# Altium PCB PCB_Slave_Traffic_Light.PcbDoc
Units mil, origin at the board's own origin, x right, y up, seen from the top; angles counter-clockwise.
Board outline 4800 x 4500 mil, 2 copper layers (Top Layer, Bottom Layer); 17 components, 38 nets, 137 pads, 36 vias.
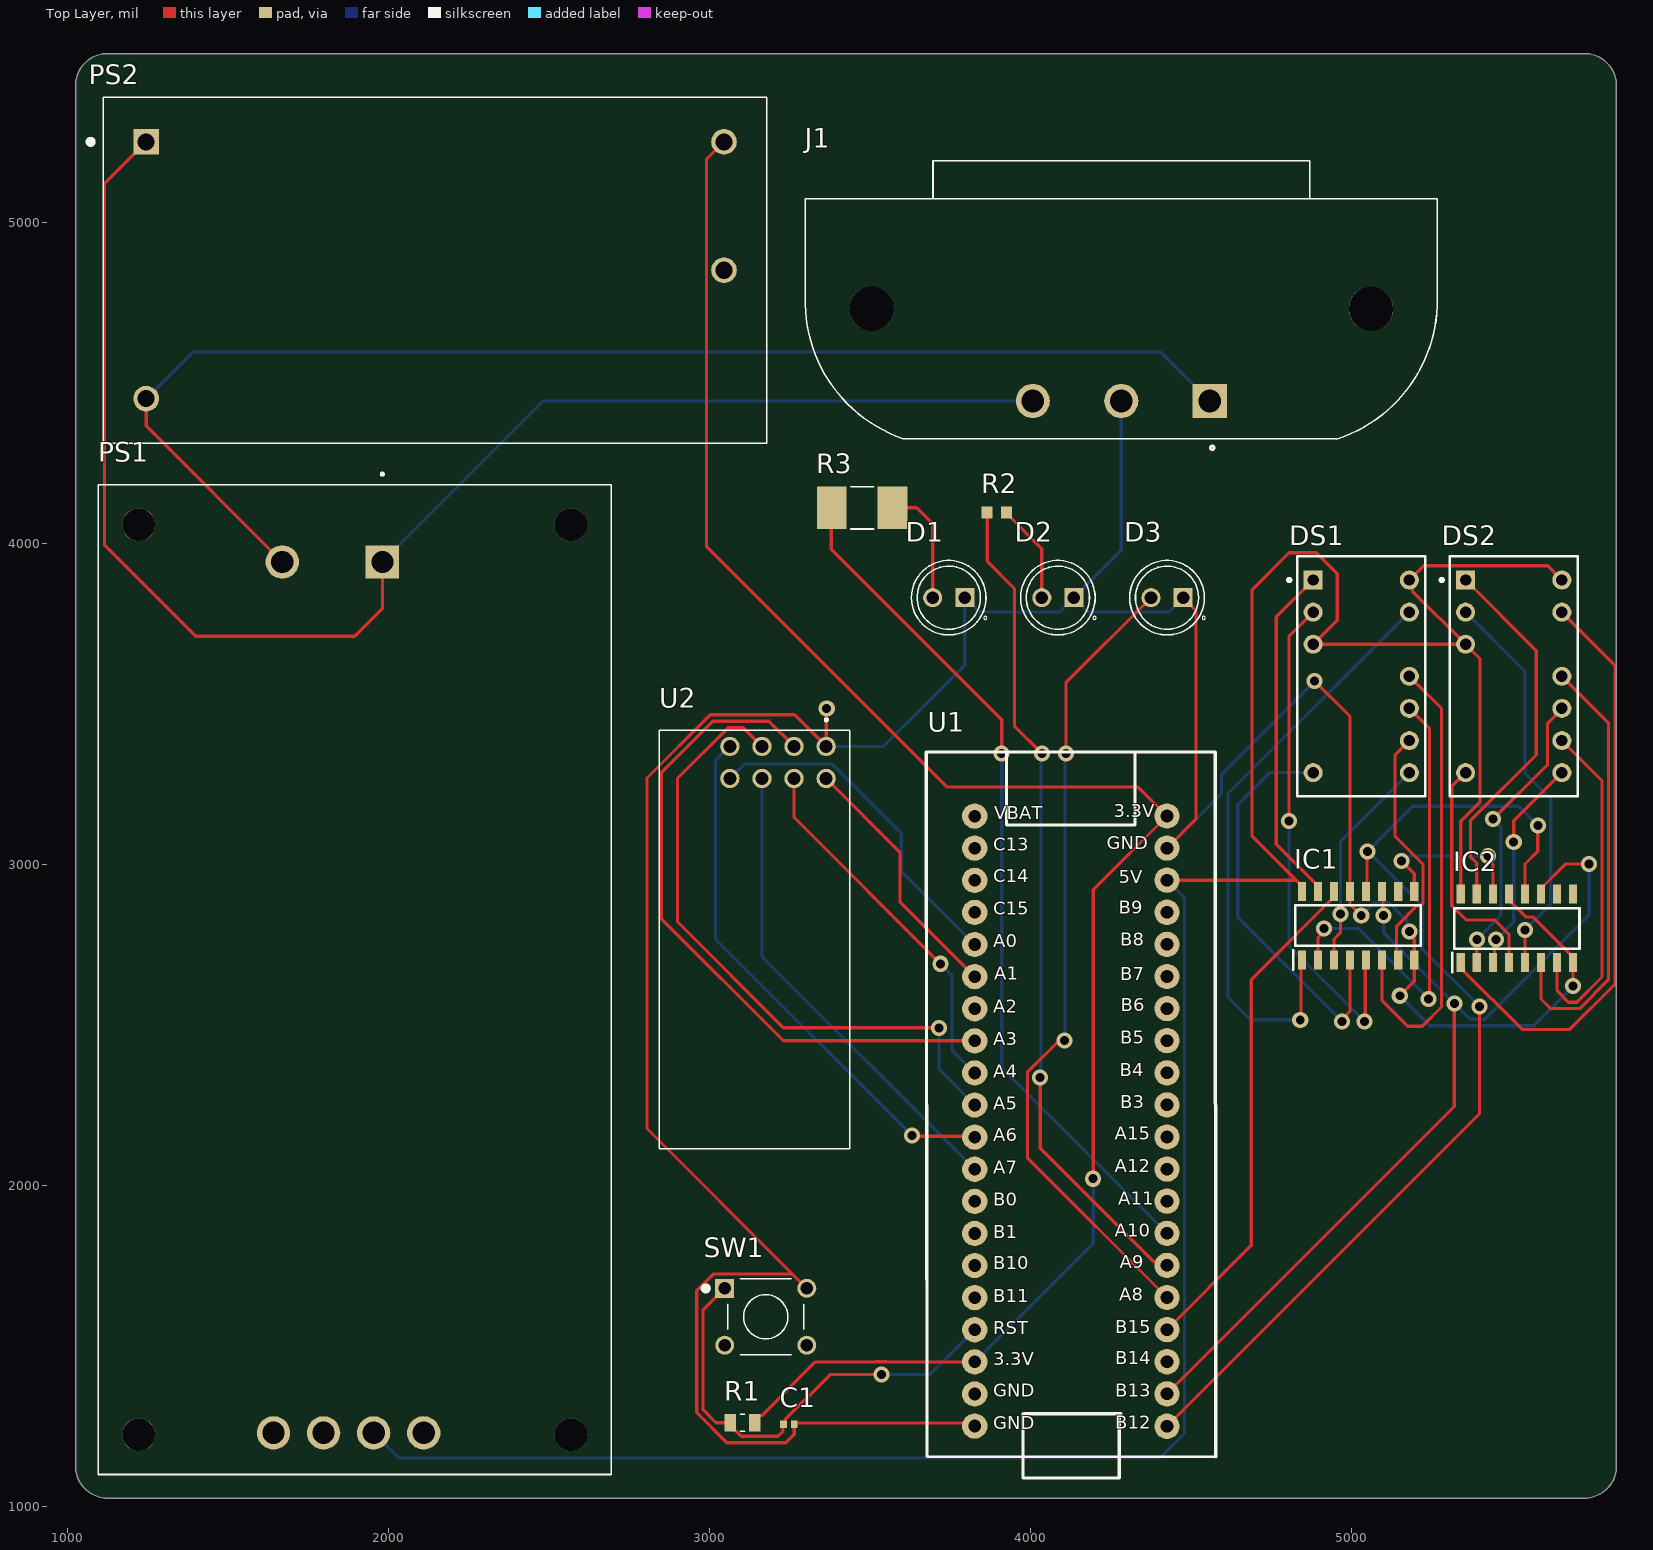
[diagram p0: Top Layer view]
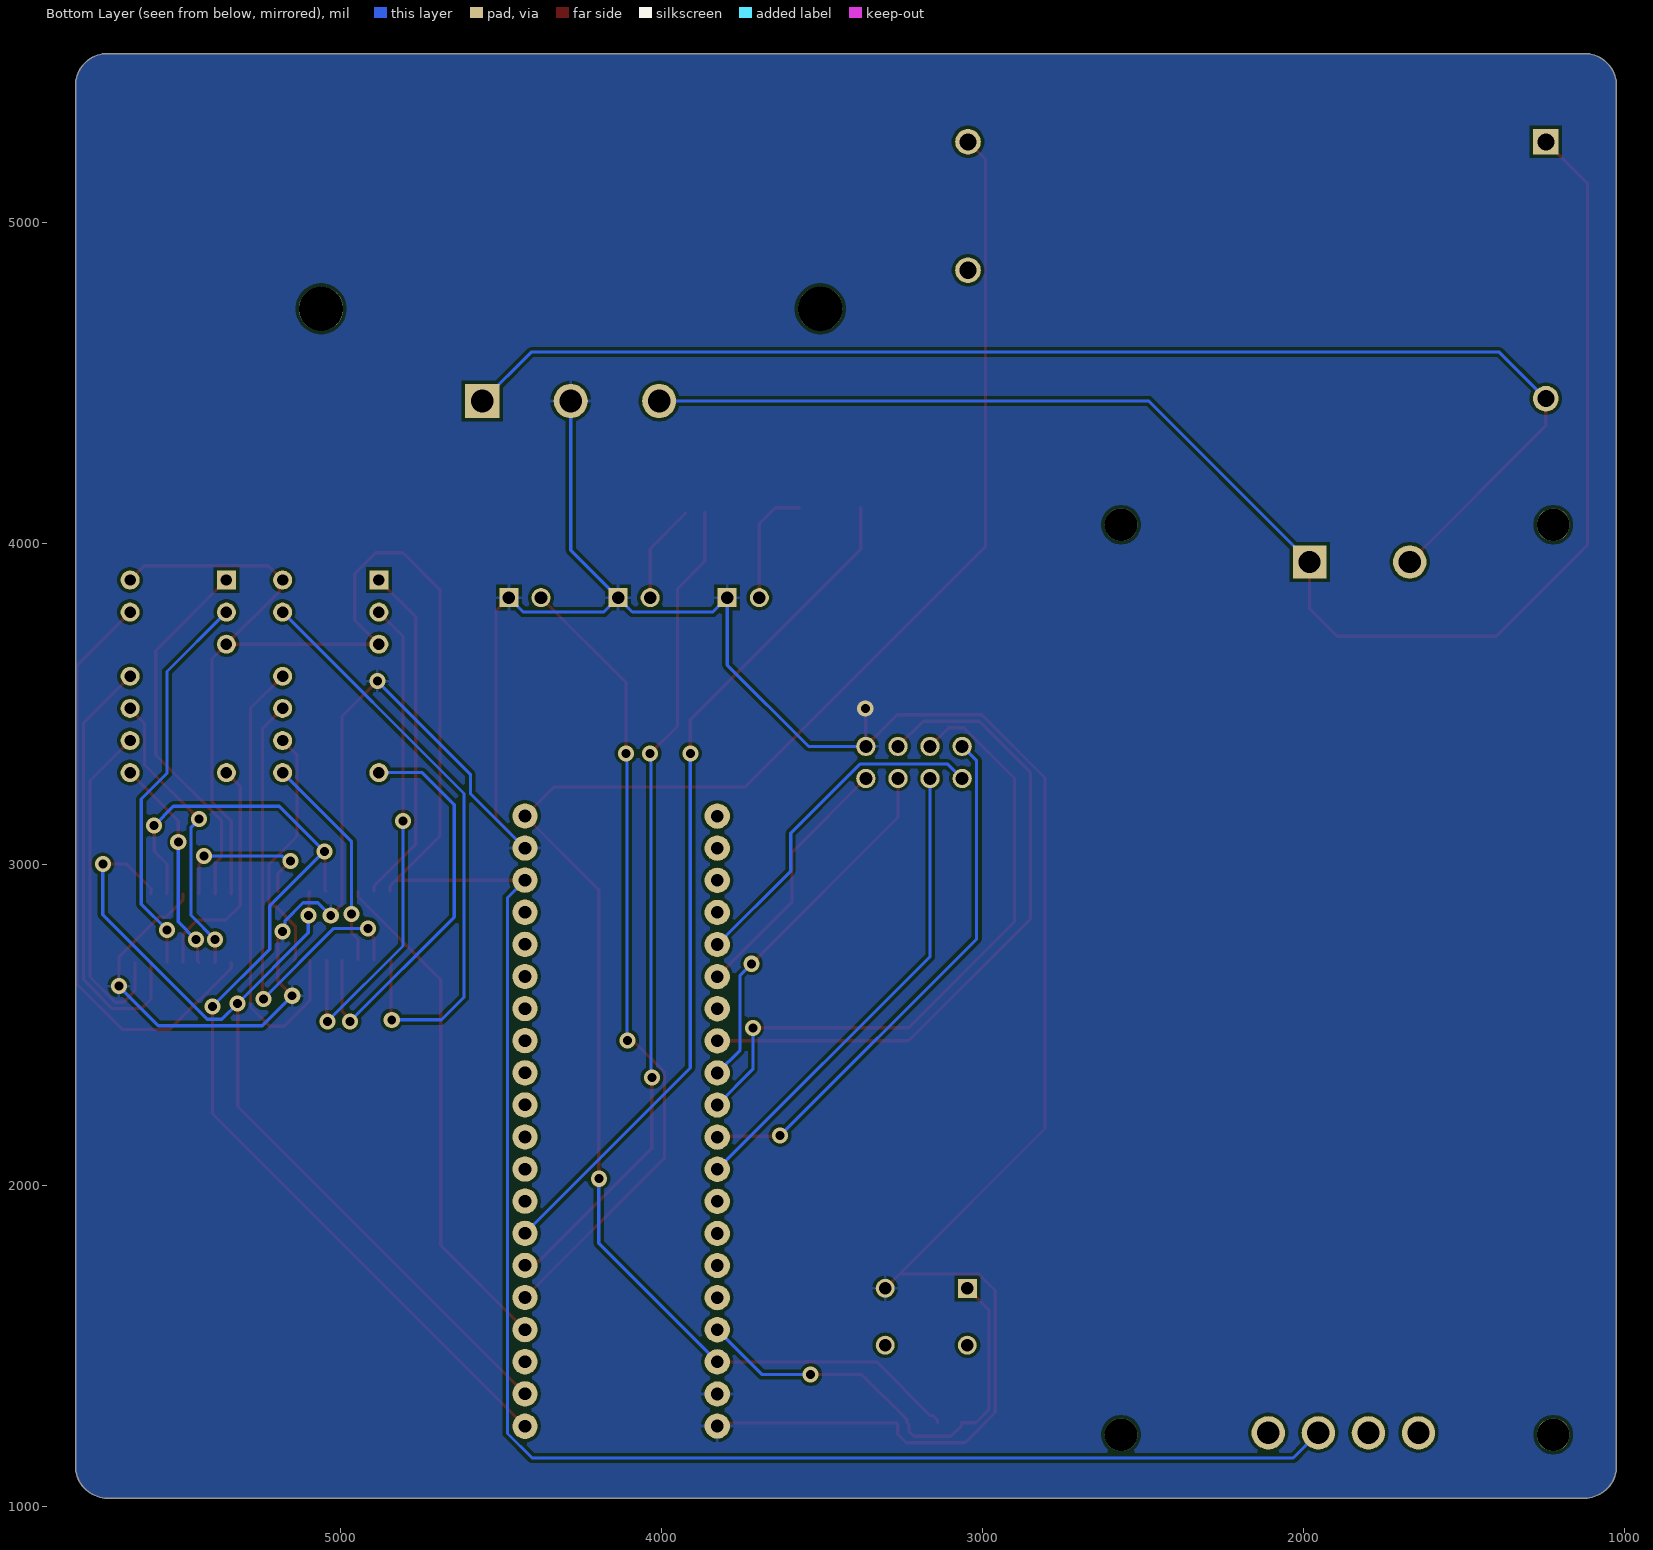
[diagram p1: Bottom Layer view, seen from below]
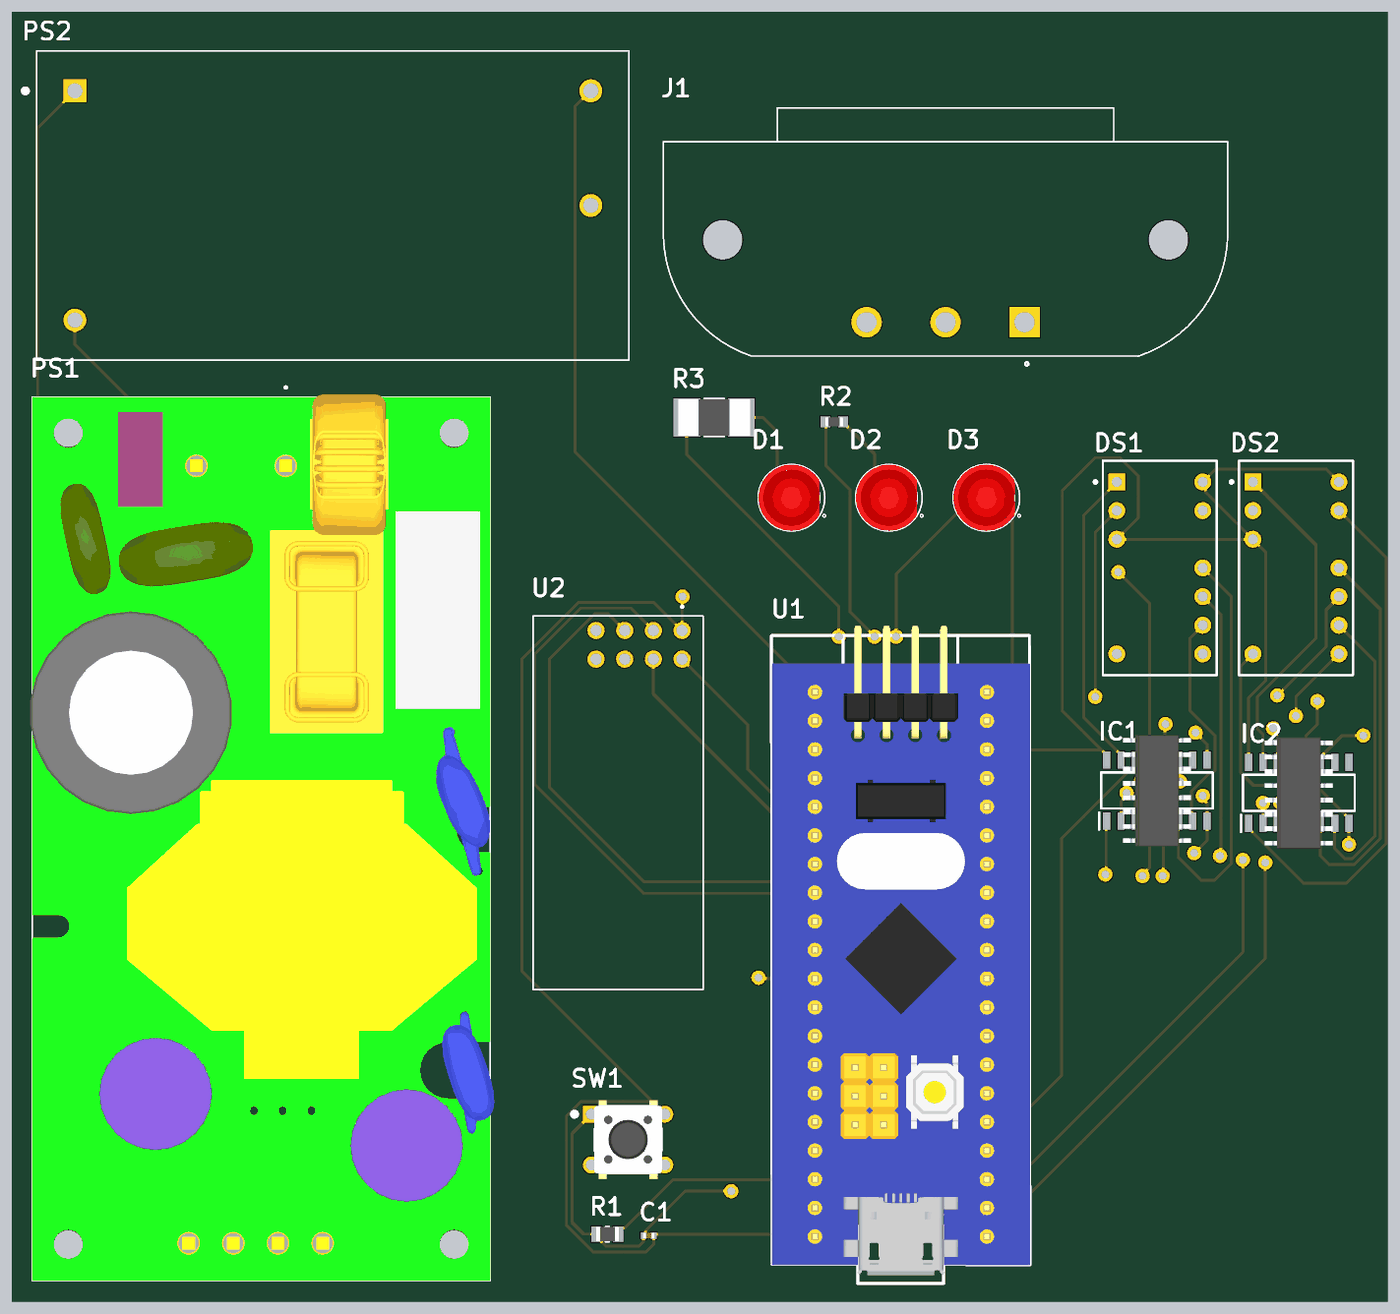
[diagram p2: 3D render of the assembled board from above, using the file's embedded part models]

## Layer stack, top to bottom
Top Solder: solder mask 0.4, Solder Resist, Dk 3.5
Top Layer: signal copper 1.4
Dielectric 1: dielectric 12.6, FR-4, Dk 4.8
Bottom Layer: signal copper 1.4
Bottom Solder: solder mask 0.4, Solder Resist, Dk 3.5

## Board outline
1025,1125 ccw(c1125,1125) 1125,1025 1130,1025 5725,1025 ccw(c5725,1125) 5825,1125 5825,5425 ccw(c5725,5425) 5725,5525 1125,5525 ccw(c1125,5425) 1025,5425

## Design rules (kind name [scope] priority, off if disabled: settings)
Clearance [All] p1: gap=10 ignorepadtopadclearanceinfootprint=FALSE
PolygonConnect [All] p1: connectstyle=Relief reliefconductorwidth=10 reliefentries=4 polygonreliefangle="90 Angle" airgapwidth=10
RoutingVias [All] p1: holewidth=28 width=50 viastyle="Through Hole" minholewidth=28 minwidth=50 maxholewidth=28 maxwidth=50
SolderMaskExpansion [All] p1: expansion=4 istentingtop=FALSE
SupplyNets "Schematic Supply Nets" [InNet('GND')] p1: voltage=0.000
Width [All] p1: maxlimit=10 minlimit=10 preferedwidth=10
30 further rules are at their usual default settings.

## Components (designator, comment, footprint, x,y, rotation, side; value= is the part's Value field where it differs from the comment)
C1 "10n" CAPC1005X55N 3247.01,1255 r180 top
D1 "Red Led" LED_WP7113ID 3745,3830 r180 top
D2 "Yellow Led" LED_WP7113SYD 4085,3830 r180 top
D3 "Green Led" LED_WP7113GD 4425,3830 r180 top
DS1 "HDSP-311A" F-10(14) 5030,3585 r0 top
DS2 "HDSP-311A" F-10(14) 5505,3585 r0 top
IC1 "74HC595D" SOIC127P600X175-16N 5020,2808.23 r90 top
IC2 "74HC595D" SOIC127P600X175-16N 5515,2800 r90 top
J1 "AC Connector" QUALTEK_703W-00/52 4558.15,4442.6 r180 top
PS1 "AC-DC Convertor 5V" CONV_RACM40-05SK/OF/PCB-T 1895,2640 r270 top
PS2 "AC-DC Convertor 3.3V" CONV_RAC10-3.3SK/277 2145,4850 r0 top
R1 "10k" RESC2012X60N 3102.6,1260 r180 top
R2 "4k7" RESC1608X55N 3894.29,4095 r0 top
R3 "220" RESC6332X120N 3475.32,4110 r0 top
SW1 "Button - Reset" SW_FSM8JH 3175,1590 r0 top
U1 "STM32F103C8T6" "Stm32 BluePill" 4116.8,2426.5 r0 top
U2 "NRF24L01P-MODULE-PCB" XCVR_NRF24L01P-MODULE-PCB 3140,2765 r270 top

## Footprints (in the part's own frame and the unit in brackets; to place one, negate y for a bottom-side part, rotate by r counter-clockwise, add the part's x,y. Pads: shape width x height; smd on the part's side, far side on the other; paste and mask are expansions set on the pad)
CAPC1005X55N [mm]
  rect 0.54x0.6 smd: 1(-0.432,0) 2(0.432,0)
  body extent -0.5,-0.25 0.5,0.25, height 0.55
CONV_RAC10-3.3SK/277 [mm]
  rect 2.03x2.03 hole 1.35: 1(-22.86,10.16)
  round 2.03 hole 1.35: 2(-22.86,-10.16) 4(22.86,0) 5(22.86,10.16)
  silkscreen extent -27.45,-13.7 26.25,13.7
CONV_RACM40-05SK/OF/PCB-T [mm]
  rect 2.64x2.64 / inner round 2.64 / far side rect 2.64x2.64 hole 1.76: 1(-33.05,2.18)
  round 2.64 hole 1.76: 3(-33.05,-5.74) 4(35.85,-6.43) 5(35.85,-2.47) 6(35.85,1.49) 7(35.85,5.45)
  round 2.6 hole 2.6 unplated: ""(-36,17.1) ""(-36,-17.1) ""(36,17.1) ""(36,-17.1)
  silkscreen extent -40.1,-20.3 39.15,20.3, body extent -39.41,-20.54 39.15,20.65, height 22
F-10(14) [mm] "LED, 7-Segment Display, 10.16 mm, RHD; 14 Leads (4 Absent); Row Space 7.62 mm; Pitch 2.54 mm"
  rect 1.5x1.5 hole 0.9: 1(-3.81,7.62)
  round 1.5 hole 0.9: 2(-3.81,5.08) 3(-3.81,2.54) 7(-3.81,-7.62) 8(3.81,-7.62) 9(3.81,-5.08) 10(3.81,-2.54) 11(3.81,0) 13(3.81,5.08) 14(3.81,7.62)
  silkscreen extent -5.82,-9.5 5.05,9.5
LED_WP7113GD [mm]
  round 1.508 hole 1: A(1.27,0)
  rect 1.508x1.508 / inner round 1.508 / far side rect 1.508x1.508 hole 1: C(-1.27,0)
  silkscreen extent -3.03,-2.95 2.95,2.95, body extent -2.5,-2.95 2.95,2.95, height 9.6
LED_WP7113ID [mm]
  round 1.508 hole 1: A(1.27,0)
  rect 1.508x1.508 / inner round 1.508 / far side rect 1.508x1.508 hole 1: C(-1.27,0)
  silkscreen extent -3.03,-2.95 2.95,2.95, body extent -2.5,-2.95 2.95,2.95, height 9.6
LED_WP7113SYD [mm]
  round 1.508 hole 1: A(1.27,0)
  rect 1.508x1.508 / inner round 1.508 / far side rect 1.508x1.508 hole 1: C(-1.27,0)
  silkscreen extent -3.03,-2.95 2.95,2.95, body extent -2.5,-2.95 2.95,2.95, height 9.6
QUALTEK_703W-00/52 [mm]
  rect 2.7x2.7 hole 1.8: 1(0,0)
  round 2.7 hole 1.8: 2(7,0) 3(14,0)
  round 3.5 hole 3.5 unplated: ""(-12.75,-7.3) ""(26.75,-7.3)
  silkscreen extent -18,-19 32,3.85
RESC1608X55N [mm]
  rect 0.87x0.97 smd: 1(-0.78,0) 2(0.78,0)
  body extent -0.8,-0.4 0.8,0.4, height 0.55
RESC2012X60N [mm]
  rect 0.92x1.38 smd: 1(-0.955,0) 2(0.955,0)
  silkscreen extent -0.17,-0.68 0.17,0.68, body extent -1,-0.63 1,0.63, height 0.6
RESC6332X120N [mm]
  rect 2.37x3.37 smd: 1(-2.405,0) 2(2.405,0)
  silkscreen extent -0.9,-1.68 0.9,1.68, body extent -3.17,-1.6 3.17,1.6, height 1.2
SOIC127P600X175-16N [mm]
  rect 1.525x0.65 smd: 1(-2.712,4.445) 2(-2.712,3.175) 3(-2.712,1.905) 4(-2.712,0.635) 5(-2.712,-0.635) 6(-2.712,-1.905) 7(-2.712,-3.175) 8(-2.712,-4.445) 9(2.712,-4.445) 10(2.712,-3.175) 11(2.712,-1.905) 12(2.712,-0.635) 13(2.712,0.635) 14(2.712,1.905) 15(2.712,3.175) 16(2.712,4.445)
  silkscreen extent -3.47,-4.95 1.6,5.12, body extent -3,-4.95 3,4.95, height 1.75
"Stm32 BluePill" [mm]
  round 2 hole 1: 1(7.828,-29.909) 2(7.828,-27.343) 3(7.828,-24.803) 4(7.828,-22.263) 5(7.828,-19.723) 6(7.828,-17.183) 7(7.828,-14.643) 8(7.828,-12.103) 9(7.828,-9.563) 10(7.828,-7.023) 11(7.828,-4.483) 12(7.828,-1.943) 13(7.828,0.597) 14(7.828,3.137) 15(7.828,5.677) 16(7.828,8.217) 17(7.828,10.757) 18(7.828,13.297) 19(7.828,15.837) 20(7.828,18.377) 21(-7.386,18.366) 22(-7.386,15.826) 23(-7.386,13.286) 24(-7.386,10.746) 25(-7.386,8.206) 26(-7.386,5.666) 27(-7.386,3.126) 28(-7.386,0.586) 29(-7.386,-1.954) 30(-7.386,-4.494) 31(-7.386,-7.034) 32(-7.386,-9.574) 33(-7.386,-12.114) 34(-7.386,-14.654) 35(-7.386,-17.194) 36(-7.386,-19.734) 37(-7.386,-22.274) 38(-7.386,-24.814) 39(-7.386,-27.354) 40(-7.386,-29.894)
  silkscreen extent -11.22,-34 11.69,23.43, body extent -11.18,-33.27 11.68,24.29, height 12.31
SW_FSM8JH [mm]
  rect 1.498x1.498 / inner round 1.498 / far side rect 1.498x1.498 hole 0.99: 1(-3.25,2.25)
  round 1.498 hole 0.99: 2(-3.25,-2.25) 3(3.25,2.25) 4(3.25,-2.25)
  silkscreen extent -4.95,-3 3,3, body extent -3,-3.95 3,3.95, height 9.5
XCVR_NRF24L01P-MODULE-PCB [mil]
  round 60 hole 40: 1(-601.75,223.18) 2(-501.75,223.18) 3(-601.75,123.18) 4(-501.75,123.18) 5(-601.75,23.18) 6(-501.75,23.18) 7(-601.75,-76.82) 8(-501.75,-76.82)
  silkscreen extent -688,-297 652,297

## Part data
C1: library part GCM155R11H103KA40D, "Multilayer Ceramic Capacitors MLCC - SMD/SMT", Package="1005 Taiyo Yuden", Check_prices=https://www.snapeda.com/parts/GCM155R11H103KA40D/Murata/view-part/?ref=eda, MF=Murata, MP=GCM155R11H103KA40D, SnapEDA_Link=https://www.snapeda.com/parts/GCM155R11H103KA40D/Murata/view-part/?ref=snap
D1: library part WP7113ID, "Red 617nm LED Indication - Discrete 2V Radial", Package="Radial Kingbright", Availability="In Stock", Check_prices=https://www.snapeda.com/parts/WP7113ID/Kingbright/view-part/?ref=eda, MF=Kingbright, MP=WP7113ID, Price=None, Purchase-URL=https://pricing.snapeda.com/search/part/WP7113ID/?ref=eda, SnapEDA_Link=https://www.snapeda.com/parts/WP7113ID/Kingbright/view-part/?ref=snap
D2: library part WP7113SYD, "Yellow 590nm LED Indication - Discrete 2V Radial", Package="Radial Kingbright", Check_prices=https://www.snapeda.com/parts/WP7113SYD/Kingbright/view-part/?ref=eda, MF=Kingbright, MP=WP7113SYD, SnapEDA_Link=https://www.snapeda.com/parts/WP7113SYD/Kingbright/view-part/?ref=snap
D3: library part WP7113GD, "Green 568nm LED Indication - Discrete 2.2V Radial", Package="Radial Kingbright", Check_prices=https://www.snapeda.com/parts/WP7113GD/Kingbright/view-part/?ref=eda, MF=Kingbright, MP=WP7113GD, SnapEDA_Link=https://www.snapeda.com/parts/WP7113GD/Kingbright/view-part/?ref=snap
DS1 DS2: "10.16 mm Single Digit General Purpose AlGaAs Red 7-Segment Display: CA, RH DP", LED_Colour="AlGaAs Red", PackageDocument=20-Aug-2001, ComponentLink1Description="Manufacturer Link", ComponentLink1URL=http://www.agilent.com/, ComponentLink2Description=Datasheet, ComponentLink2URL=http://cp.literature.agilent.com/litweb/pdf/5988-2969EN.pdf, DatasheetDocument=20-Aug-2001, LatestRevisionDate=11-Oct-2004, LatestRevisionNote="Display outline superimposed on PCB Footprint.", LuminousIntensity="3200 ucd (Minimum).", Note="No pins are present in positions 4, 5, 6 and 12.", PackageReference=F-10(14), Published=26-May-2004, Publisher="Altium Limited"
IC1 IC2: "Shift Register Single 8-Bit Serial to Serial/Parallel 16-Pin SOIC T/R", Package="SOIC-16 ON Semiconductor", Check_prices=https://www.snapeda.com/parts/74HC595D/NXP+Semiconductors/view-part/?ref=eda, MF="NXP Semiconductors", MP=74HC595D, SnapEDA_Link=https://www.snapeda.com/parts/74HC595D/NXP+Semiconductors/view-part/?ref=snap
J1: library part 703W-00/52, "Power Entry Connector Receptacle, Male Blades IEC 320-C14 Panel Mount, Flange; Through Hole, Right Angle", Package=None, Availability=Unavailable, MF=Qualtek, MP=703W-00/52, Price=None, SnapEDA_Link=https://www.snapeda.com/parts/703W-00/52/Qualtek/view-part/46399/?ref=snap
PS1: library part RACM40-05SK/OF/PCB-T, "Open Frame AC DC Converters 1 Uitgang 5V - - - 6A 80 ~ 264 VAC, 120 ~ 370 VDC Input", Package="DIP-7 Recom Power", Check_prices=https://www.snapeda.com/parts/RACM40-05SK/OF/PCB-T/Recom+Power/view-part/?ref=eda, MF="Recom Power", MP=RACM40-05SK/OF/PCB-T, SnapEDA_Link=https://www.snapeda.com/parts/RACM40-05SK/OF/PCB-T/Recom+Power/view-part/?ref=snap
PS2: library part RAC10-3.3SK/277, "10W AC/DC-Converter 'POWERLINE' 2x1 4kV reg", Package="DIP-4 Recom Power", Arrow_Electronics-Purchase-URL=https://snapeda.com/shop?store=Arrow+Electronics&id=2246573, Availability=Warning, DigiKey-Purchase-URL=https://snapeda.com/shop?store=DigiKey&id=2246573, MF="Recom Power", Mouser-Purchase-URL=https://snapeda.com/shop?store=Mouser&id=2246573, MP=RAC10-3.3SK/277, Price=None, SnapEDA_Link=https://www.snapeda.com/parts/RAC10-3.3SK/277/Recom%20Power/view-part/2246573/?ref=snap
R1: library part RC0805FR-0710KL, "10 kOhms Â±1% 0.125W, 1/8W Chip Resistor 0805 (2012 Metric) Moisture Resistant Thick Film", Package="2012 Rohm Semiconductor", Availability="In Stock", Check_prices=https://www.snapeda.com/parts/RC0805FR-0710KL/Yageo/view-part/?ref=eda, MF=Yageo, MP=RC0805FR-0710KL, Price=None, Purchase-URL=https://pricing.snapeda.com/search/part/RC0805FR-0710KL/?ref=eda, SnapEDA_Link=https://www.snapeda.com/parts/RC0805FR-0710KL/Yageo/view-part/?ref=snap
R2: library part CRG0603F4K7, "Resistor, Thick Film, Res 4.7 Kilohms, Pwr-Rtg 0.1 W, Tol 1%, SMT, 0603", Package=0603, Power_Rating=".1 W", Resistance=4.7K, Tolerance=1%, Voltage_Rating="50 V", Check_prices=https://www.snapeda.com/parts/CRG0603F4K7/TE+Connectivity+Passive+Product/view-part/?ref=eda, EU_RoHS_Compliance="Compliant with Exemptions", MF="TE Connectivity", MP=CRG0603F4K7, SnapEDA_Link=https://www.snapeda.com/parts/CRG0603F4K7/TE+Connectivity+Passive+Product/view-part/?ref=snap
R3: library part 3522220RFT, "220 Ohms Â±1% 3W Chip Resistor 2512 (6432 Metric) Automotive AEC-Q200 Thick Film", Package=2512, Power_Rating="3 W", Tolerance=1%, Check_prices=https://www.snapeda.com/parts/3522220RFT/TE+Connectivity/view-part/?ref=eda, EU_RoHS_Compliance="Compliant with Exemptions", MF="TE Connectivity", MP=3522220RFT, Resistance=220, SnapEDA_Link=https://www.snapeda.com/parts/3522220RFT/TE+Connectivity/view-part/?ref=snap
SW1: library part FSM8JH, "Tactile Switch SPST-NO Top Actuated Through Hole", Package=None, Availability="In Stock", Check_prices=https://www.snapeda.com/parts/FSM8JH/TE+Connectivity+ALCOSWITCH+Switches/view-part/?ref=eda, MF="TE Connectivity", MP=FSM8JH, Price=None, SnapEDA_Link=https://www.snapeda.com/parts/FSM8JH/TE+Connectivity+ALCOSWITCH+Switches/view-part/?ref=snap
U1: library part BluePill, "Designed By @Alixahedi"
U2: "- Transceiver For Use With nRF24L01+", Package=None, Availability=Bad, MF="Nordic Semiconductor", Mouser-Purchase-URL=https://snapeda.com/shop?store=Mouser&id=230534, MP=NRF24L01P-MODULE-PCB, Price=None, SnapEDA_Link=https://www.snapeda.com/parts/NRF24L01P-MODULE-PCB/Nordic%20Semiconductor%20ASA/view-part/230534/?ref=snap

## Via types
v1: diameter 50, hole 28, Top Layer to Bottom Layer, 36 vias

## Nets (pads, with @x,y where several pads share a name; then routed paths per layer and width w, separated by ;. In a path a pad name is that pad's centre, name@x,y a point inside that pad or via, vN(x,y) a via of type N, cw(c..) or ccw(c..) an arc to the next point about the centre after c; other vN are vias at no path point)
GND: C1.1 D1.C D2.C D3.C IC1.8 IC1.13 IC2.8 IC2.13 J1.2 SW1.3 U1.19 U1.39 U1.40 U2.1 | length 10212.7
  Top Layer w10: SW1.3 3258.46,1723.07 ; v1(3365,3485) ccw(c3365,3483.18) 3363.18,3483.18 U2.1 3264.93,3465 3001.72,3465 2805,3268.28 2805,2176.54 3258.46,1723.07 ; U1.40 3816.15,1259.42 3268.44,1259.42 C1.1 3264.02,1224.02 3237.83,1197.83 3053.88,1197.83 2960,1291.72 2960,1671.73 3011.35,1723.07 3258.46,1723.07 ; U1.19 4515,3140 4515,3790 D3.C ; v1(4885,3570) 4995,3460 IC1.13 4995,2875 v1(5030,2840) ; v1(5150,2590) 5195,2635 IC1.8 5195,2764.18 5180,2779.18 v1(5180,2790) ; IC2.13 5490,2889.55 5544.55,2835 5565.45,2835 5690,2710.45 IC2.8 v1(5690,2620)
  Bottom Layer w10: U2.1 3541.75,3366.75 3795,3620 D1.C 3839.69,3785.31 4090.31,3785.31 D2.C ; J1.2 4282.56,3977.56 D2.C ; U1.19 4595,3220 4595,3280 v1(4885,3570) ; D3.C 4430.31,3785.31 4179.69,3785.31 D2.C ; v1(5030,2840) 5070,2880 5116.57,2880 5172.35,2824.22 5172.35,2797.65 v1(5180,2790) ; v1(5150,2590) 5243.28,2496.72 5566.72,2496.72 v1(5690,2620)
Line: J1.1 PS1.3 PS2.2 | length 4120.8
  Top Layer w10: PS2.2 1245,4365.2 PS1.3
  Bottom Layer w10: PS2.2 1390,4595 4405.75,4595 J1.1
NetC1_2: C1.2 R1.2 SW1.1 U1.37 | length 1446.5
  Top Layer w10: SW1.1 2980,1611.54 2980,1300 3020,1260 R1.2 3065,1250.94 3098.11,1217.83 3212.83,1217.83 3229.05,1234.05 3229.05,1254.05 C1.2 3235.63,1260.63 3235.63,1270.27 3375.36,1410 v1(3535,1410)
  Bottom Layer w10: v1(3535,1410) 3686.43,1410 U1.37
NetD1_A: D1.A R3.2 | length 375.7
  Top Layer w10: R3.2 3645,4110 3695,4060 D1.A
NetD2_A: D2.A R2.2 | length 310.6
  Top Layer w10: R2.2 3925,4093.03 4035,3983.03 D2.A
NetDS1_1: DS1.1 IC1.15 | length 1071.5
  Top Layer w10: DS1.1 4765,3770 4765,3062.22 4895,2932.22 IC1.15
NetDS1_2: DS1.2 IC1.5 | length 1596.9
  Top Layer w10: v1(4805,3135) 4805,3710 DS1.2 ; v1(5040,2510) 5042.5,2512.5 5042.5,2698.96 IC1.5
  Bottom Layer w10: v1(4805,3135) 4805,2745 v1(5040,2510)
NetDS1_7: DS1.7 IC1.4 | length 1287.9
  Top Layer w10: v1(4970,2510) 4970,2516.57 4995,2541.57 IC1.4
  Bottom Layer w10: DS1.7 4745,3285 4645,3185 4645,2835 v1(4970,2510)
NetDS1_8: DS1.8 IC1.3 | length 680.9
  Top Layer w10: IC1.3 4945,2766.43 4965,2786.43 v1(4965,2845)
  Bottom Layer w10: v1(4965,2845) 4965,3070 DS1.8
NetDS1_9: DS1.9 IC1.7 | length 780.7
  Top Layer w10: IC1.7 5140,2706.46 5140,2806.57 5203.41,2869.98 5214.01,2869.98 5222.8,2878.77 5222.8,2998.77 5135.47,3086.1 5135.47,3340.47 DS1.9
NetDS1_10: DS1.10 IC1.2 | length 1455.3
  Top Layer w10: IC1.2 4895,2769.81 4914.18,2789 v1(4914.18,2799.82) ; DS1.10 5242.8,3422.2 5242.8,2582.8 v1(5240,2580)
  Bottom Layer w10: v1(4914.18,2799.82) 5020.18,2799.82 v1(5240,2580)
NetDS1_11: DS1.11 IC1.6 | length 1440.9
  Top Layer w10: IC1.6 5095,2575 5175,2495 5220,2495 5280,2555 5280,3485 DS1.11
NetDS1_13: DS1.13 IC1.1 | length 1876.6
  Top Layer w10: v1(4840,2515) 4842.5,2517.5 4842.5,2698.96 IC1.1
  Bottom Layer w10: v1(4840,2515) 4685,2515 4615,2585 4615,3220 DS1.13
NetDS2_1: DS2.1 IC2.15 | length 1162.6
  Top Layer w10: DS2.1 5575,3665 5575,3340 5370,3135 5370,3023.43 5390,3003.43 IC2.15
NetDS2_2: DS2.2 IC2.5 | length 1234.7
  Top Layer w10: IC2.5 v1(5540,2795)
  Bottom Layer w10: DS2.2 5540,3600 5540,3282.91 5620,3202.91 5620,2875 v1(5540,2795)
NetDS2_7: DS2.7 IC2.4 | length 735.2
  Top Layer w10: DS2.7 5312.2,3242.2 5312.2,2870.54 5356.69,2826.05 5445.51,2826.05 5490,2781.57 IC2.4
NetDS2_8: DS2.8 IC2.3 | length 680.8
  Top Layer w10: IC2.3 5445,2698.23 5445,2760 v1(5450,2765) ; v1(5505,3068.42) 5505,3135 DS2.8
  Bottom Layer w10: v1(5450,2765) 5505,2820 v1(5505,3068.42)
NetDS2_9: DS2.9 IC2.7 | length 1063.6
  Top Layer w10: IC2.7 5640,2605 5675,2570 5701.72,2570 5780,2648.28 5780,3260 DS2.9
NetDS2_10: DS2.10 IC2.2 | length 922.2
  Top Layer w10: IC2.2 v1(5390,2765) ; v1(5440,3140) 5610.47,3310.47 5610.47,3438.75 5655,3483.27 DS2.10
  Bottom Layer w10: v1(5390,2765) 5465,2840 5465,3115 v1(5440,3140)
NetDS2_11: DS2.11 IC2.6 | length 1378
  Top Layer w10: IC2.6 5590,2580 5620,2550 5710,2550 5800,2640 5800,3440 DS2.11
NetDS2_13: DS2.13 IC2.1 | length 1862.7
  Top Layer w10: IC2.1 5340,2676 5531,2485 5680,2485 5820,2625 5820,3620 DS2.13
NetIC1_9: IC1.9 IC2.14 | length 512.2
  Top Layer w10: v1(5155,3010) 5195,2970 IC1.9 ; v1(5425,3025) 5425,3014.18 5440,2999.18 IC2.14
  Bottom Layer w10: v1(5155,3010) 5165.82,3010 5180.82,3025 v1(5425,3025)
Neutral: J1.3 PS1.1 PS2.1 | length 4707.5
  Top Layer w10: PS2.1 1115,5120 1115,3995 1400,3710 1895,3710 1980.83,3795.83 PS1.1
  Bottom Layer w10: PS1.1 2482.24,4442.6 J1.3
Out3.3: PS2.5 R1.1 U1.20 U1.38 | length 5784.2
  Top Layer w10: PS2.5 2990.04,5195.04 2990.04,3989.96 3740,3240 4335,3240 U1.20 4195,2920 v1(4195,2020) ; R1.1 3140.2,1269.06 3153.31,1282.17 3162.36,1282.17 3329.77,1449.57 3518,1449.57 3518.43,1450 3551.57,1450 3552,1449.57 U1.38
  Bottom Layer w10: U1.38 4195,1818.57 v1(4195,2020)
Out5: DS1.3 DS1.14 DS2.3 DS2.14 IC1.16 IC2.16 PS1.6 U1.18 | length 8413.7
  Top Layer w10: U1.18 4827.22,2950 ; IC1.16 4845,2932.22 4827.22,2950 ; IC2.16 5340,3133.28 5399.53,3192.81 5399.53,3640.47 DS2.3 ; DS2.14 5610.47,3929.53 5224.53,3929.53 DS1.14 5189.39,3875.61 5189.39,3850.61 DS2.3 ; 4827.22,2950 4690,3087.22 4690,3855 4805,3970 4890,3970 4955,3905 4955,3760 DS1.3 DS2.3
  Bottom Layer w10: PS1.6 2032.24,1150 4402.89,1150 4479.37,1226.48 4479.37,2895.63 U1.18
PA0: U1.25 U2.8 | length 1083.4
  Bottom Layer w10: U2.8 3108.18,3311.75 3381.82,3311.75 3597.34,3096.24 3597.34,2978.24 U1.25
PA1: U1.26 U2.2 | length 808.9
  Top Layer w10: U2.2 3592.8,3037.14 3592.8,2882.77 U1.26
PA3: U1.28 U2.3 | length 2100.5
  Top Layer w10: U2.3 3184.93,3445 3010,3445 2850,3285 2850,2830 3230.43,2449.57 U1.28
PA4: U1.29 U2.4 | length 1150.3
  Top Layer w10: U2.4 3263.18,3145.26 v1(3718.83,2689.61)
  Bottom Layer w10: v1(3718.83,2689.61) 3755,2653.45 3755,2420.57 U1.29
PA5: U1.30 U2.5 | length 2038
  Top Layer w10: U2.5 3104.93,3425 3057.8,3425 2900,3267.2 2900,2820 3230,2490 v1(3715,2490)
  Bottom Layer w10: v1(3715,2490) 3715,2360.57 U1.30
PA6: U1.31 U2.7 | length 1682.1
  Top Layer w10: v1(3630,2155) 3632.71,2152.29 3823.29,2152.29 U1.31
  Bottom Layer w10: U2.7 3018.18,3321.75 3018.18,2766.82 v1(3630,2155)
PA7: U1.32 U2.6 | length 1491.7
  Bottom Layer w10: U2.6 3163.18,2712.39 U1.32
PA8: D3.A U1.5 | length 2529.4
  Top Layer w10: v1(4105,2450) 4097.35,2442.35 4080.78,2442.35 3990,2351.57 3990,2085 U1.5 ; v1(4110,3345) 4110,3565 D3.A
  Bottom Layer w10: v1(4105,2450) 4107.5,2452.5 4107.5,3342.5 v1(4110,3345)
PA9: R2.1 U1.6 | length 2599.3
  Top Layer w10: R2.1 3865,4093.58 3865,3942.88 3950,3857.88 3950,3430 v1(4035,3345) ; v1(4030,2335) 4030,2115 4165,1980 4381.85,1763.15 4411.85,1763.15 U1.6
  Bottom Layer w10: v1(4030,2335) 4032.5,2337.5 4032.5,3342.5 v1(4035,3345)
PA10: R3.1 U1.7 | length 2694.2
  Top Layer w10: R3.1 ccw(c3380.63,4108.32) 3378.95,4108.32 3378.95,3981.05 3910,3450 v1(3910,3345)
  Bottom Layer w10: v1(3910,3345) 3910,2365 U1.7
PB12: IC1.12 IC2.12 U1.1 | length 3308.1
  Top Layer w10: U1.1 5398.28,2222.28 v1(5398.28,2556.72) ; IC1.12 5047.5,2917.5 5047.5,3037.5 v1(5050,3040) ; IC2.12 5540,3000.48 5580,3040.48 v1(5580,3120)
  Bottom Layer w10: v1(5398.28,2556.72) 5220,2735 5220,2870 v1(5050,3040) 5190,3180 5520,3180 v1(5580,3120)
PB13: IC1.11 IC2.11 U1.2 | length 2960.8
  Top Layer w10: U1.2 5320,2245 v1(5320,2565.81) ; IC1.11 5097.5,2912.5 5097.5,2842.5 v1(5100,2840) ; IC2.11 5590,2924 5666,3000 v1(5740,3000)
  Bottom Layer w10: v1(5100,2840) 5100,2785.81 v1(5320,2565.81) 5369.1,2516.72 5414.85,2516.72 5740,2841.86 v1(5740,3000)
PB15: IC1.14 U1.4 | length 1580.4
  Top Layer w10: U1.4 4687.68,1812.68 4687.68,2640.45 4945,2897.78 IC1.14
pads on no net: IC1.10 IC2.9 IC2.10 J1. PS1. PS1.4 PS1.5 PS1.7 PS2.4 SW1.2 SW1.4 U1.3 U1.8 U1.9 U1.10 U1.11 U1.12 U1.13 U1.14 U1.15 U1.16 U1.17 U1.21 U1.22 U1.23 U1.24 U1.27 U1.33 U1.34 U1.35 U1.36

## Polygon pours and split planes (outlines as drawn)
GND on Bottom Layer "GND_L02_P000" (solid, pour order 0): 1025,5425 cw(c1125,5425) 1125,5525 5725,5525 cw(c5725,5425) 5825,5425 5825,1125 cw(c5725,1125) 5725,1025 1125,1025 cw(c1125,1125) 1025,1125 1025,1240

## Text inside footprints (layer, text, board x,y; h text height)
U1: Top Overlay "5V" at 4274,2926.28 h70; Top Overlay "B9" at 4274,2831.28 h70; Top Overlay "B8" at 4279,2731.28 h70; Top Overlay "3.3V" at 4259,3131.28 h70; Top Overlay "GND" at 4236.8,3032.28 h70; Top Overlay "A5" at 3884,2221.28 h70; Top Overlay "A2" at 3884,2522.5 h70; Top Overlay "A3" at 3884,2422.28 h70; Top Overlay "A4" at 3884,2320.5 h70; Top Overlay "RST" at 3884,1521.28 h70; Top Overlay "B10" at 3884,1723.28 h70; Top Overlay "B11" at 3884,1621.5 h70; Top Overlay "A6" at 3884,2123.28 h70; Top Overlay "A7" at 3884,2021.5 h70; Top Overlay "B0" at 3884,1921.28 h70; Top Overlay "B1" at 3884,1820.5 h70; Top Overlay "3.3V" at 3884,1424.28 h70; Top Overlay "B15" at 4264.4,1525.28 h70; Top Overlay "A8" at 4276.5,1626.28 h70; Top Overlay "A11" at 4273.2,1924.5 h70; Top Overlay "B3" at 4279,2225.28 h70; Top Overlay "A9" at 4277.7,1727.28 h70; Top Overlay "A15" at 4261.9,2127.28 h70; Top Overlay "A12" at 4261.9,2025.5 h70; Top Overlay "A10" at 4261.9,1825.28 h70; Top Overlay "VBAT" at 3886.86,3126.5 h70; Top Overlay "B5" at 4279,2426.28 h70; Top Overlay "B14" at 4263.2,1427.5 h70; Top Overlay "B7" at 4279,2624.5 h70; Top Overlay "B4" at 4277.7,2324.5 h70; Top Overlay "B6" at 4280.2,2527.28 h70; Top Overlay "C15" at 3884,2828.28 h70; Top Overlay "C13" at 3884,3027.28 h70; Top Overlay "C14" at 3884,2929.28 h70; Top Overlay "A0" at 3884,2727.28 h70; Top Overlay "A1" at 3886.8,2626.5 h70; Top Overlay "GND" at 3884,1326.28 h70; Top Overlay "B13" at 4264,1326.28 h70; Top Overlay "GND" at 3884,1225.28 h70; Top Overlay "B12" at 4264.4,1227.5 h70